# EAGLE board untitled kopie 2 (EAGLE 6.5.0)
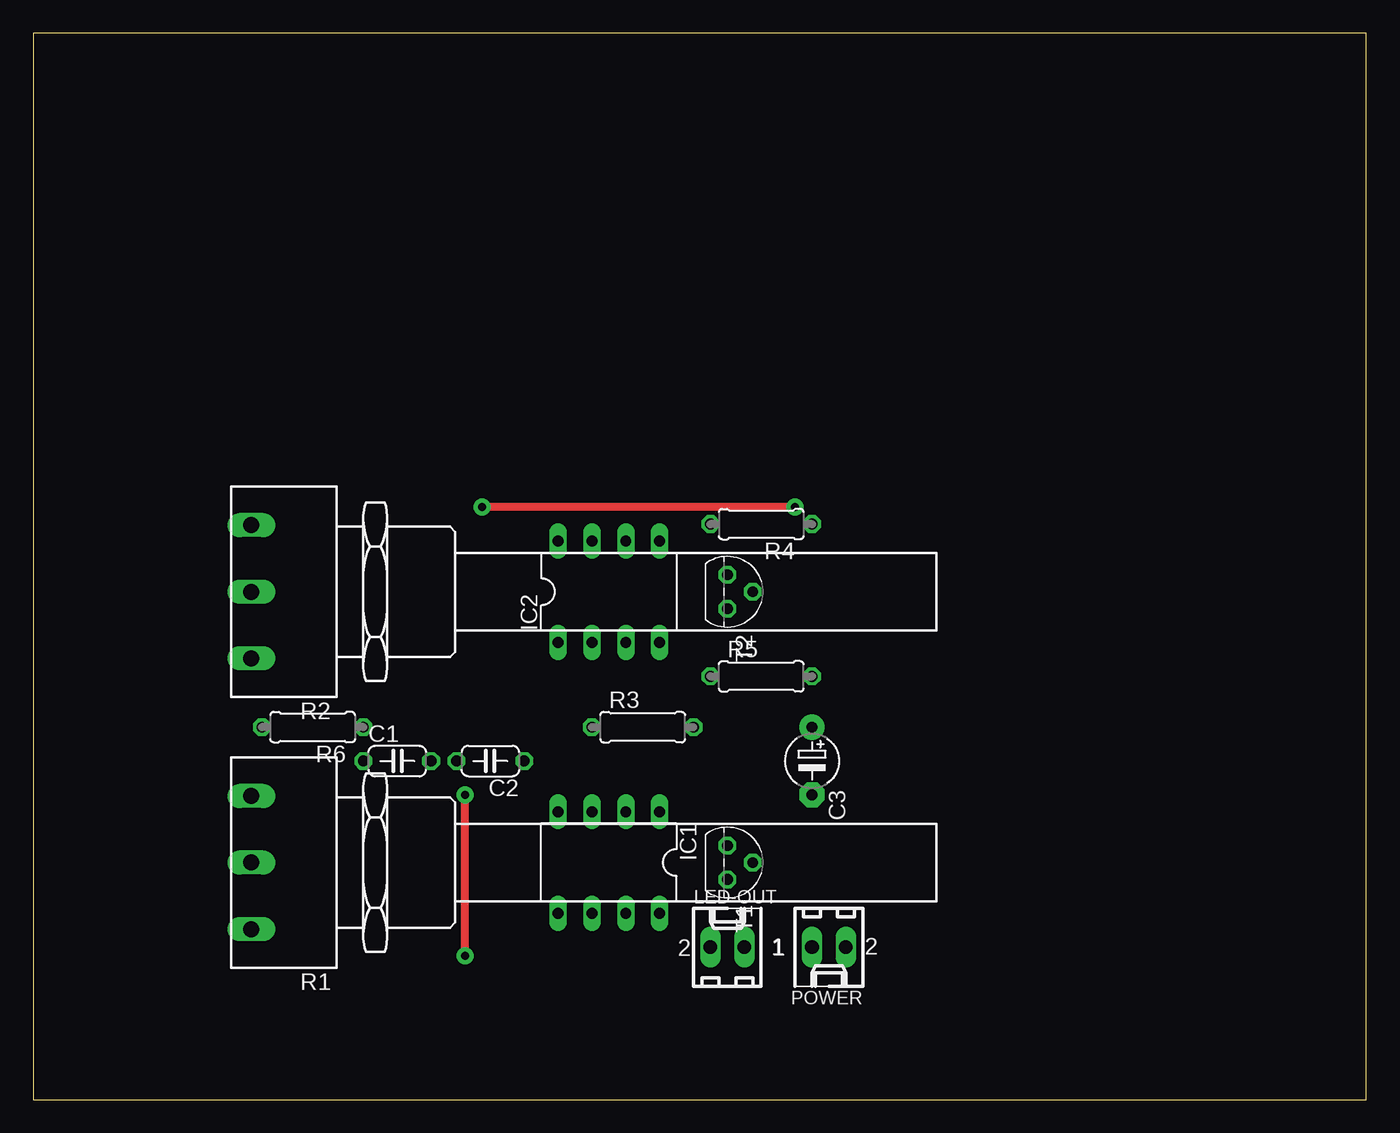
[diagram p0: board, top side]
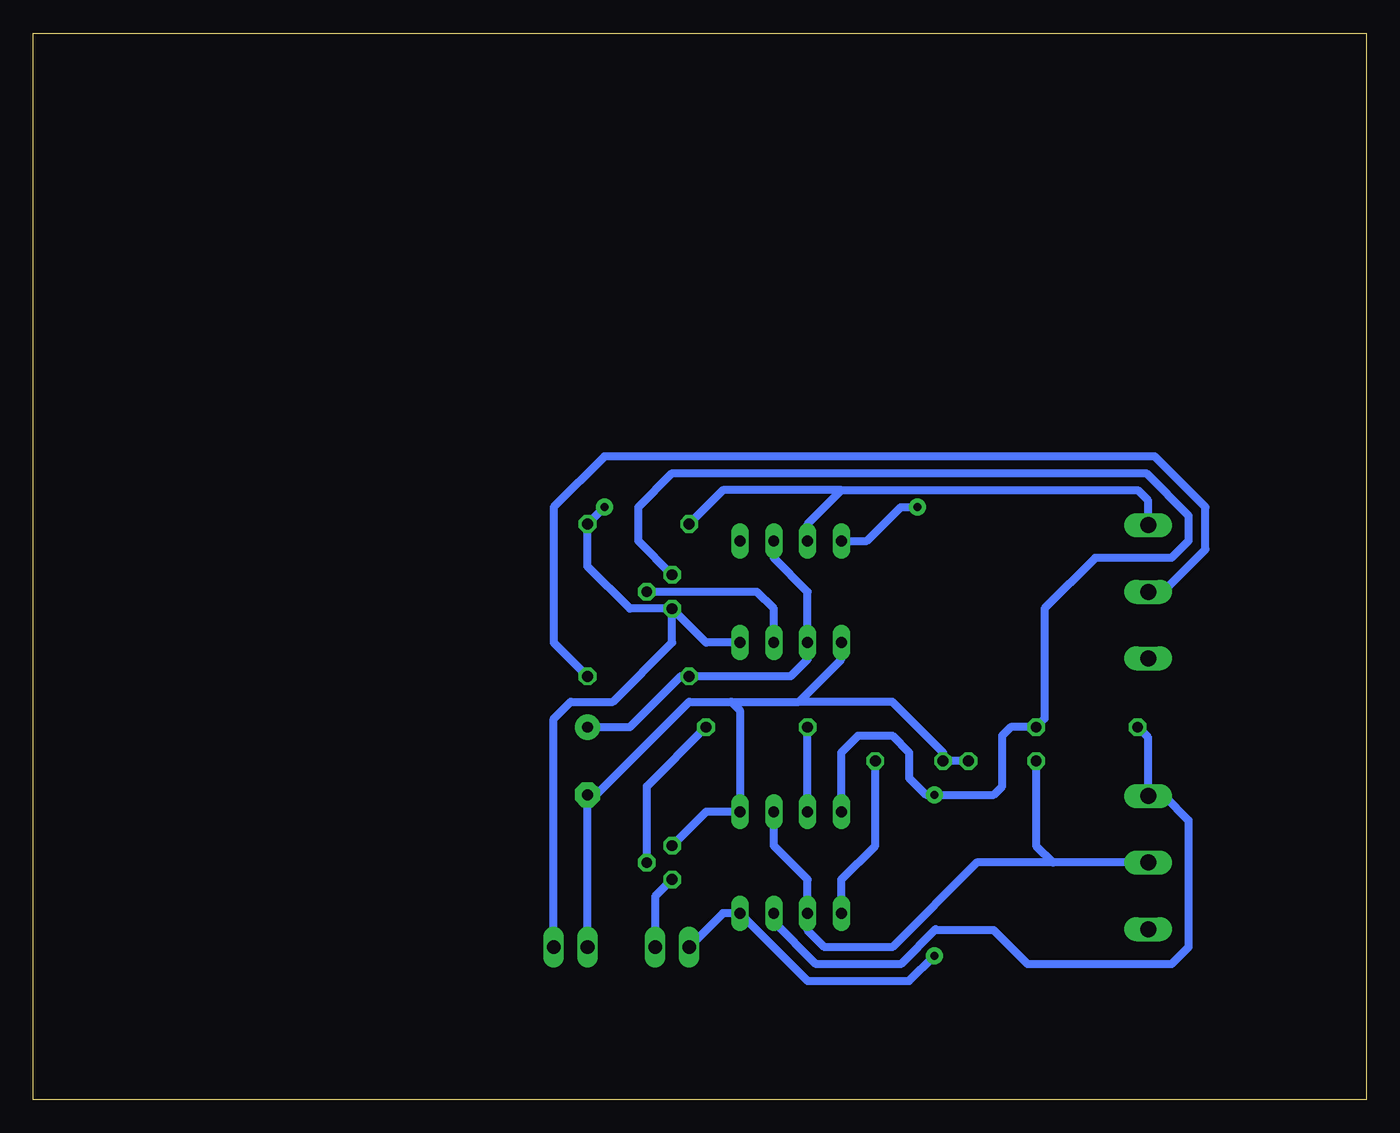
[diagram p1: board, bottom side, seen from below]

Size 100 x 80 mm. Coordinates in mm from the lower left corner, seen from the top.
Outline: 0,0 100,0 100,80 0,80 0,0
Copper layers (1*16): Top 0.035mm / dielectric 1.5mm / Bottom 0.035mm
Design rules "default": minimum track width 10mil, minimum drill 24mil, track to track 8mil, track to pad 8mil, pad to pad 8mil, via to via 8mil, smd to smd 8mil, copper to edge 40mil, drill to drill 8mil, minimum pad ring 10mil, minimum via ring 8mil, stop-mask expansion 4mil, vias tented up to drill 0mil, thermal gap 10mil

## Footprints (pad centres in the part's own frame; a part is rotated, then mirrored left to right if it is on the bottom)
C050-024X044 = drill 0.813 octagon: 1 -2.54,0; 2 2.54,0
E5-4 = drill 0.813 pad 1.905: + -2.54,0 | drill 0.813 pad 1.905 octagon: - 2.54,0
DIL-08 = drill 0.813 long: 1 -3.81,-3.81; 2 -1.27,-3.81; 3 1.27,-3.81; 4 3.81,-3.81; 5 3.81,3.81; 6 1.27,3.81; 7 -1.27,3.81; 8 -3.81,3.81
6410-02 = drill 1.016 long: 1 1.27,0; 2 -1.27,0
PC16S = drill 1.2 long: 1A -5,6.5; 1E 5,6.5; 1S 0,6.5
0207/7 = drill 0.813 octagon: 1 -3.81,0; 2 3.81,0
TO92 = drill 0.813 octagon: 1 1.27,0; 2 0,1.905; 3 -1.27,0

## Placement (x,y rotation side)
C1  102  [C050-024X044]  27.3,25.4 0 top
C2  102  [C050-024X044]  34.29,25.4 180 top
C3  1uf  [E5-4]  58.42,25.4 270 top
IC1  NE555  [DIL-08]  43.18,17.78 180 top
IC2  NE555  [DIL-08]  43.18,38.1 0 top
LED-OUT  22-27-2021-02  [6410-02]  52.07,11.43 0 top
POWER  22-27-2021-02  [6410-02]  59.69,11.43 180 top
R1  PC16S  [PC16S]  22.86,17.78 90 top
R2  PC16S  [PC16S]  22.86,38.1 90 top
R3  100k  [0207/7]  45.72,27.94 0 top
R4  10k  [0207/7]  54.61,43.18 180 top
R5  100k  [0207/7]  54.61,31.75 0 top
R6  100k  [0207/7]  20.95,27.94 180 top
T1  2N3904  [TO92]  52.07,17.78 270 top
T2  2N3904  [TO92]  52.07,38.1 270 top

## Library data of the parts
C1 C2 = rcl 2
C3 R3-R6 = rcl-2
IC1 IC2 = st-microelectronics 2
LED-OUT POWER = con-molex 2
R1 R2 = piher 2
T1 T2 = transistor 2

## Nets
+12V: IC2.4 IC2.8 POWER.2 R4.1 T2.1
GND: C1.2 C2.2 C3.- IC1.1 IC2.1 POWER.1 T1.3
N$1: IC1.7 R1.1E R6.2
N$2: LED-OUT.1 T1.1
N$3: R2.1S R5.2
N$4: C2.1 IC1.5
N$5: IC1.3 R3.1
N$6: R3.2 T1.2
N$8: IC2.3 T2.2
N$9: C1.1 IC1.2 IC1.6 R1.1S
N$13: C3.+ IC2.2 IC2.6 R5.1
N$14: IC2.7 R2.1E R4.2
VOUT: IC1.4 IC1.8 LED-OUT.2 R6.1 T2.3

## Tracks (layer width: path | path; a pad name or v marks a point on that pad's centre or on a via)
+12V  (via drill 0.6 pad 1.27)
  Top 0.61: v57.15,44.45 v33.66,44.45
  Bottom 0.61: POWER.2 60.96,28.57 59.69,29.84 56.52,29.84 52.07,34.29 T2.1 | IC2.8 37.47,41.91 34.92,44.45 v33.66,44.45 | IC2.4 49.53,34.29 T2.1 | T2.1 55.24,36.83 58.42,40.01 R4.1 v57.15,44.45
GND
  Bottom 0.61: POWER.1 C3.- 57.78,22.86 50.8,29.84 47.62,29.84 | 47.62,29.84 46.99,29.21 IC1.1 49.53,21.59 T1.3 | 47.62,29.84 42.55,29.84 | 42.55,29.84 39.37,33.02 IC2.1 | 42.55,29.84 35.56,29.84 31.75,26.04 C2.2 C1.2
N$1
  Bottom 0.61: IC1.7 44.45,13.34 41.27,10.16 34.92,10.16 32.3,12.78 32.23,12.7 27.94,12.7 25.4,10.16 14.61,10.16 13.34,11.43 13.34,20.95 15.16,22.78 R1.1E 16.36,27.16 R6.2
N$2
  Bottom 0.61: T1.1 53.34,15.24 LED-OUT.1
N$3
  Bottom 0.61: R2.1S 15.24,38.1 12.06,41.27 12.06,44.45 15.88,48.26 57.15,48.26 60.96,44.45 60.96,34.29 R5.2
N$4
  Bottom 0.61: IC1.5 39.37,16.51 36.83,19.05 C2.1
N$5
  Bottom 0.61: IC1.3 R3.1
N$6
  Bottom 0.61: T1.2 53.98,23.5 R3.2
N$8
  Bottom 0.61: IC2.3 44.45,36.83 45.72,38.1 T2.2
N$9
  Bottom 0.61: R1.1S 23.5,17.78 | 23.5,17.78 29.21,17.78 35.56,11.43 40.64,11.43 41.91,12.7 IC1.6 41.91,16.51 44.45,19.05 IC1.2 | C1.1 24.77,19.05 23.5,17.78
N$13
  Bottom 0.61: IC2.6 44.45,40.64 41.91,38.1 IC2.2 41.91,33.02 43.18,31.75 R5.1 51.44,31.75 55.24,27.94 C3.+
N$14
  Bottom 0.61: 41.91,41.27 IC2.7 41.91,43.18 39.37,45.72 | 39.37,45.72 48.26,45.72 R4.2 | 39.37,45.72 17.14,45.72 16.36,44.94 R2.1E
VOUT  (via drill 0.6 pad 1.27)
  Top 0.61: v32.38,10.79 v32.38,22.86
  Bottom 0.61: T2.3 54.61,41.91 54.61,44.45 52.07,46.99 16.51,46.99 13.34,43.81 13.34,41.91 14.61,40.64 20.32,40.64 24.13,36.83 24.13,28.57 R6.1 26.67,27.94 27.3,27.3 27.3,23.5 27.94,22.86 v32.38,22.86 33.02,22.86 34.29,24.13 34.29,26.04 35.56,27.3 38.1,27.3 39.37,26.04 IC1.4 | LED-OUT.2 48.26,13.97 IC1.8 41.91,8.89 34.29,8.89 v32.38,10.79